# Altium PCB ESP32_USB_C.PcbDoc (part 1 of 3)
Units mil, origin at the board's own origin, x right, y up, seen from the top; angles counter-clockwise.
Board outline 2700 x 1000 mil, 4 copper layers (L1, L2, L3, L4), stack 61.605 mil thick; 61 components, 73 nets, 293 pads, 151 vias.
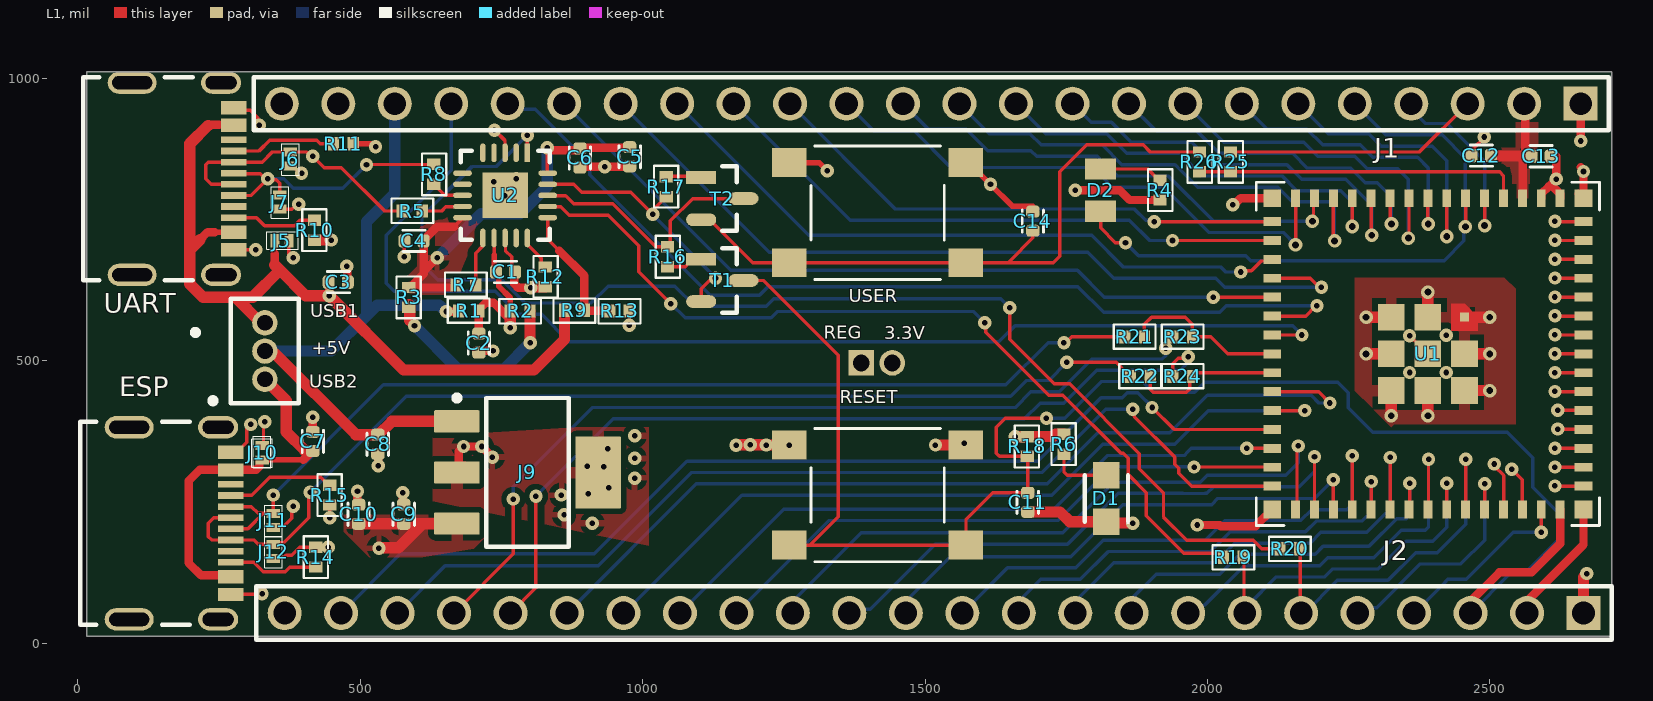
[diagram p0: L1 view]
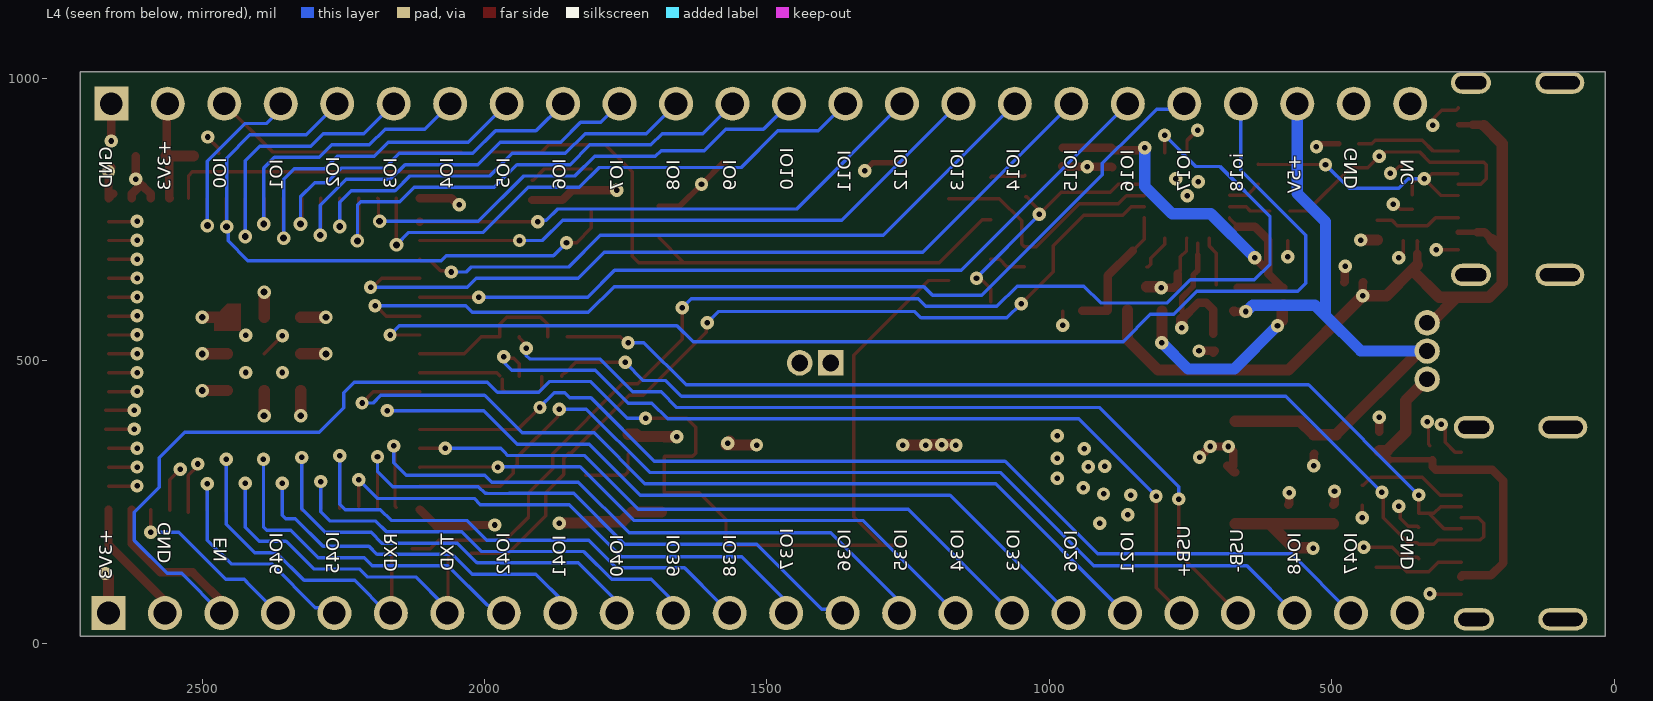
[diagram p1: L4 view, seen from below]
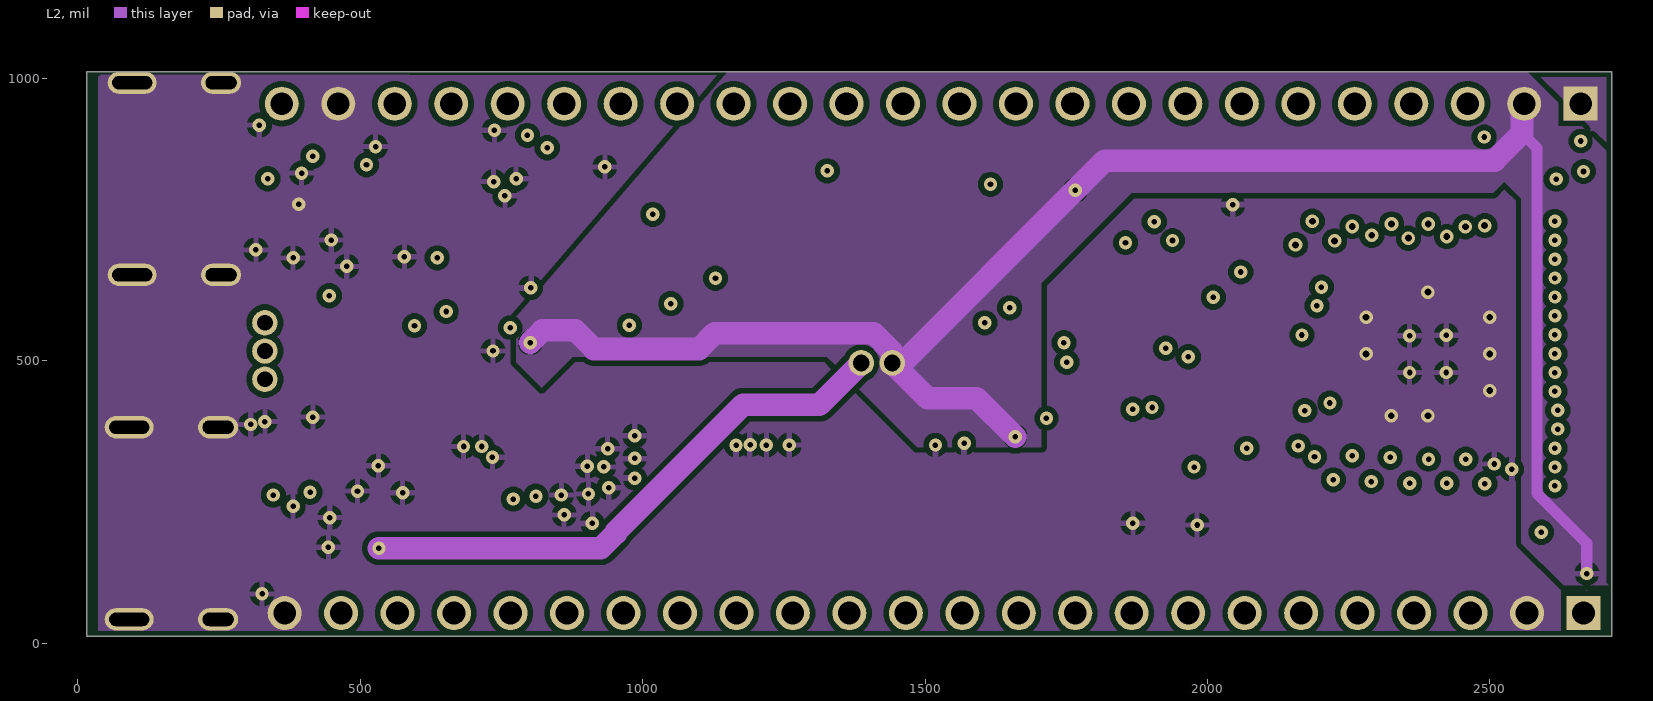
[diagram p2: L2]
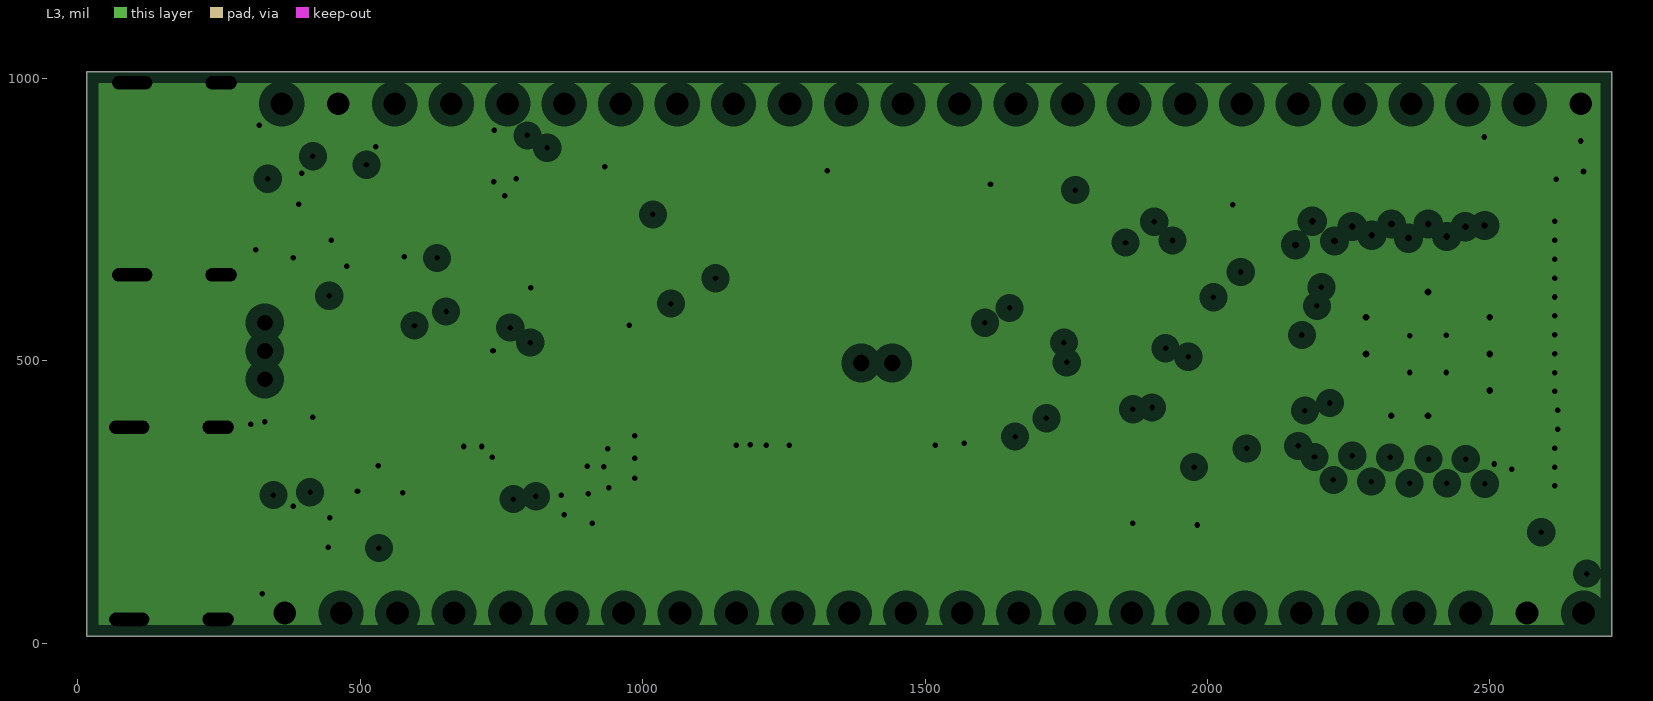
[diagram p3: L3, clearances drawn from the general rule]
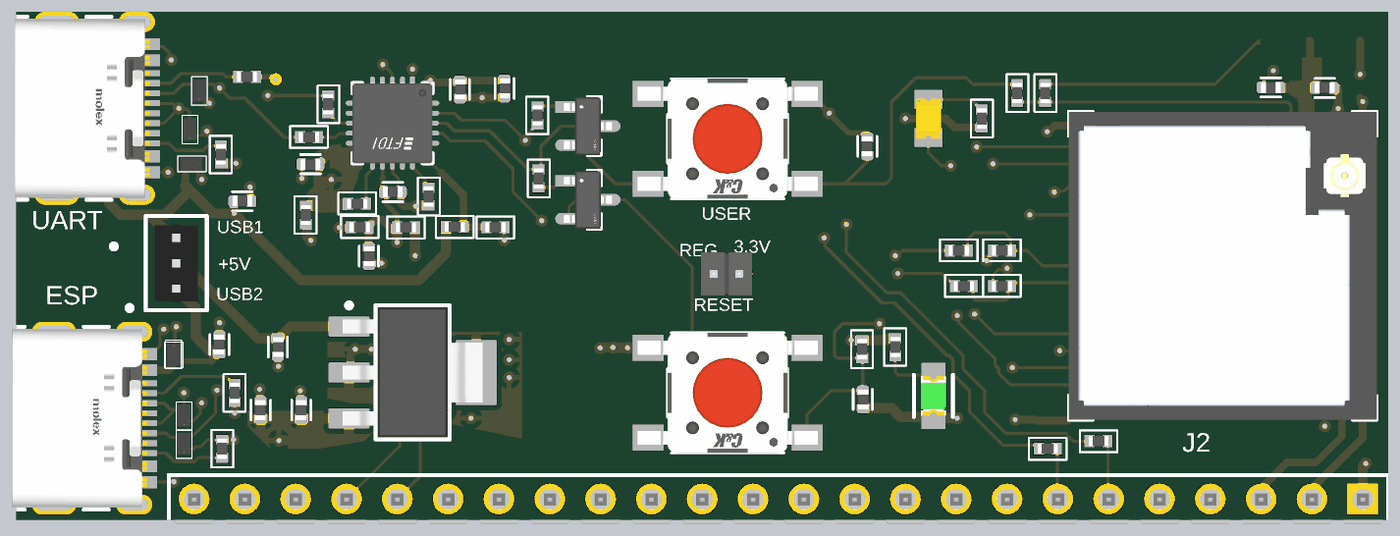
[diagram p4: 3D render of the assembled board from above, using the file's embedded part models]

## Layer stack, top to bottom
Top Solder: solder mask 0.4, Solder Resist, Dk 3.5
L1: signal copper 1.4
Dielectric 1: prepreg 3.9134, PP-006, Dk 4.1
L2: signal copper 0.5984
Dielectric1: dielectric 49.8031, FR-4, Dk 4.8
L3: plane copper 0.5984, net GND
Dielectric 2: prepreg 3.9134, PP-006, Dk 4.1
L4: signal copper 1.378
Bottom Solder: solder mask 0.4, Solder Resist, Dk 3.5

## Board outline
16,12 16,1012 2716,1012 2716,12

## Design rules (kind name [scope] priority, off if disabled: settings)
Clearance [All] p1: gap=10 ignorepadtopadclearanceinfootprint=TRUE
Clearance sall [WithinRoom('FTDI')or WithinRoom('SB1') or WithinRoom('SB2')] p2: gap=6 ignorepadtopadclearanceinfootprint=FALSE
MinimumSolderMaskSliver [All] p1: minsoldermaskwidth=1.02
PlaneClearance [All] p1: clearance=20
PlaneConnect [All] p1: planeconnectstyle=Direct reliefexpansion=20 reliefentries=4 reliefconductorwidth=10 reliefairgap=10
PolygonConnect [All] p1: thpad.connectstyle=Direct thpad.reliefconductorwidth=10 thpad.reliefentries=4 thpad.polygonreliefangle="90 Angle" thpad.airgapwidth=10 smdpad.connectstyle=Relief smdpad.reliefconductorwidth=20 smdpad.reliefentries=4 smdpad.polygonreliefangle="90 Angle" smdpad.airgapwidth=10 via.connectstyle=Direct via.reliefconductorwidth=10 via.reliefentries=4 via.polygonreliefangle="90 Angle" via.airgapwidth=10
RoomDefinition SB2 [False] p1: confinementstyle=ConfineIn formatcopy=TRUE lockcomponents=FALSE outline 226,362 331,362 331,77 226,77
RoomDefinition FTDI [False] p2: confinementstyle=ConfineIn formatcopy=TRUE lockcomponents=FALSE outline 881,687 651,687 651,927 881,927
RoomDefinition SB1 [False] p3: confinementstyle=ConfineIn formatcopy=TRUE lockcomponents=FALSE outline 331,667 216,667 216,967 331,967
RoutingVias [All] p1: holewidth=9.84 width=23.62 viastyle="Through Hole" minholewidth=9.84 minwidth=23.62 maxholewidth=12 maxwidth=24
SilkToSolderMaskClearance [IsPad] p1: minsilkscreentomaskgap=2 clearancetoexposedcopper=TRUE
SolderMaskExpansion [All] p1: expansion=1.5 istentingtop=FALSE
SupplyNets "Schematic Supply Nets_3" [InNet('+5V')] p1: voltage=0.000
SupplyNets "Schematic Supply Nets_5" [InNet('+5V_VBUS2')] p2: voltage=0.000
SupplyNets "Schematic Supply Nets_2" [InNet('+3V3_REG')] p3: voltage=0.000
SupplyNets "Schematic Supply Nets_7" [InNet('+3V3')] p4: voltage=0.000
SupplyNets "Schematic Supply Nets_6" [InNet('+5V_VBUS1')] p5: voltage=0.000
SupplyNets "Schematic Supply Nets_1" [InNet('GND')] p6: voltage=0.000
UnRoutedNet [All] p1: checkbadconnections=TRUE
Width [All] p1: maxlimit=100 minlimit=6 preferedwidth=10 minimp=50.000000 maximp=50.000000 favimp=50.000000
25 further rules are at their usual default settings.

## Components (designator, comment, footprint, x,y, rotation, side; value= is the part's Value field where it differs from the comment)
3.3V "FTS-103-01-F-DV-TR" HDRV2W40P0X127_1X2_254X214X400P 1389,496 r0 top locked (schematic designator J13)
C1 "4.7uF" CAPC1005X55N 757,657 r180 top value=4.7µF
C2 "CL10E104KC100uf,100V8VPNC" CAPC1005X55N 710,531 r90 top value=100nF
C3 "CL10E104KC100uf,100V8VPNC" CAPC1005X55N 461,639 r180 top locked value=100nF
C4 "CL10E104KC100uf,100V8VPNC" CAPC1005X55N 595,712 r0 top value=100nF
C5 "CL10E104KC100uf,100V8VPNC" CAPC1005X55N 977,861 r90 top value=100nF
C6 "CL10E104KC100uf,100V8VPNC" CAPC1005X55N 889,859 r90 top value=100nF
C7 "CL10E104KC100uf,100V8VPNC" CAPC1005X55N 416,357 r270 top locked value=100nF
C8 "4.7uF" CAPC1005X55N 531,352 r90 top locked value=4.7µF
C9 "10n F" CAPC1005X55N 577,228 r270 top locked value=10nF
C10 "10u F" CAPC1005X55N 497,228 r270 top locked value=10µF
C11 "1uF" CAPC1005X55N 1682,249 r90 top value=1µF
C12 "CL10E104KC100uf,100V8VPNC" CAPC1005X55N 2485,863 r0 top locked value=100nF
C13 "10uf,10V" CAPC1005X55N 2591,862 r180 top locked value=10µF
C14 "1uF" CAPC1005X55N 1691,747 r270 top locked value=1µF
D1 "GREEN" FP-APHCM2012CGCK-F01-MFG 1821,256 r90 top
D2 "red" LEDC2012X90N 1811,802 r90 top locked
ESP "217179-0001" FP-2171790001-MFG 136,212 r270 top locked (schematic designator J4)
J1 "22-28-4245" 7731111824LF 2650,1220 r0 top
J2 "22-28-4245" 7731111824LF 2655,318 r0 top locked
J5 "AQ3045-01ETG" RTVS_SOD882_LTF-M 361,712 r180 top
J6 "AQ3045-01ETG" RTVS_SOD882_LTF-M 376,857 r90 top
J7 "AQ3045-01ETG" RTVS_SOD882_LTF-M 357.25,780.75 r90 top
J9 "TL1963A-33DCYR (2)" DCY0004A_M 796,302 r0 top locked
J10 "AQ3045-01ETG" RTVS_SOD882_LTF-M 326,337 r270 top
J11 "AQ3045-01ETG" RTVS_SOD882_LTF-M 346,217 r90 top
J12 "AQ3045-01ETG" RTVS_SOD882_LTF-M 346,162 r90 top
R1 "0R" RESC1005X40N 692,588 r0 top locked value=0Ω
R2 "0R" RESC1005X40N 783,588 r180 top locked value=0Ω
R3 "0R" RESC1005X40N 586,612 r90 top value=0Ω
R4 "AC0603FR-101KL" RESC1005X40N 1916,802 r270 top locked value=1kΩ
R5 "27R" RESC1005X40N 592,765 r0 top value=27Ω
R6 "AC0603FR-101KL" RESC1005X40N 1746,352 r90 top value=1kΩ
R7 "OR" RESC1005X40N 687,634 r0 top value=1kΩ
R8 "27R" RESC1005X40N 630,830 r270 top locked value=27Ω
R9 "4.7K" RESC1005X40N 879,589 r180 top locked value=4.7kΩ
R10 "5K1" RESC1005X40N 419,731 r90 top locked value=5.1kΩ
R11 "5K1" RESC1005X40N 470,884 r180 top value=5.1kΩ
R12 "10K" RESC1005X40N 827.5,648.26 r270 top locked value=10kΩ
R13 "4.7K" RESC1005X40N 959,588 r180 top value=4.7kΩ
R14 "5K1" RESC1005X40N 421,152 r270 top value=5.1kΩ
R15 "5K1" RESC1005X40N 446,262 r90 top value=5.1kΩ
R16 "10K" RESC1005X40N 1044,684 r270 top locked value=10kΩ
R17 "10K" RESC1005X40N 1042,808 r90 top locked value=10kΩ
R18 "10K" RESC1005X40N 1681,348 r90 top value=10kΩ
R19 "0R" RESC1005X40N 2046,152 r180 top value=0Ω
R20 "0R" RESC1005X40N 2146,167 r180 top locked value=0Ω
R21 "0R" RESC1005X40N 1871,542 r0 top value=0Ω
R22 "0R" RESC1005X40N 1881,472 r0 top value=0Ω
R23 "0R" RESC1005X40N 1956,542 r0 top value=0Ω
R24 "0R" RESC1005X40N 1956,472 r0 top value=0Ω
R25 "27R" RESC1005X40N 2041,852 r270 top locked value=27Ω
R26 "27R" RESC1005X40N 1986,852 r270 top locked value=27Ω
RESET "PTS645SM43SMTR92LFS" PTS645SM43SMTR92LFS_MFG 1416,262 r180 top locked (schematic designator SW1)
T1 "SS8050-G" FP-SS8050-G-IPC_B 1141,642 r0 top locked
T2 "SS8050-G" FP-SS8050-G-IPC_B 1141,787 r0 top locked
U1 "ESP32-S3-MINI-1U-N8" XCVR_ESP32-S3-MINI-1U-N8 2390.41,512 r270 top locked
U2 "FT231XQ-R" FP-QFN-20-IPC_B 756.41,792.63 r270 top locked
UART "217179-0001" FP-2171790001-MFG 141.28,822.08 r270 top locked (schematic designator J3)
USB1 "FTS-103-01-F-S" SAMTEC-FTS-103-01-X-S 331,517 r270 top locked (schematic designator J8)
USER "PTS645SM43SMTR92LFS" PTS645SM43SMTR92LFS_MFG 1416,762 r180 top locked (schematic designator SW2)

## Footprints (in the part's own frame and the unit in brackets; to place one, negate y for a bottom-side part, rotate by r counter-clockwise, add the part's x,y. Pads: shape width x height; smd on the part's side, far side on the other; paste and mask are expansions set on the pad)
7731111824LF [mm]
  rect 1.53x1.53 hole 1.02: 1(0.279,-6.731)
  round 1.53 hole 1.02: 2(-2.261,-6.731) 3(-4.801,-6.731) 4(-7.341,-6.731) 5(-9.881,-6.731) 6(-12.421,-6.731) 7(-14.961,-6.731) 8(-17.501,-6.731) 9(-20.041,-6.731) 10(-22.581,-6.731) 11(-25.121,-6.731) 12(-27.661,-6.731) 13(-30.201,-6.731) 14(-32.741,-6.731) 15(-35.281,-6.731) 16(-37.821,-6.731) 17(-40.361,-6.731) 18(-42.901,-6.731) 19(-45.441,-6.731) 20(-47.981,-6.731) 21(-50.521,-6.731) 22(-53.061,-6.731) 23(-55.601,-6.731) 24(-58.141,-6.731)
  silkscreen extent -59.41,-7.93 1.55,-5.53, body extent -59.21,-7.96 1.35,-5.55, height 8.6
CAPC1005X55N [mm]
  rrect53% 0.54x0.6 smd: 1(-0.43,0) 2(0.43,0)
  silkscreen extent -0.5,-0.48 0.5,0.48, body extent -0.5,-0.3 0.5,0.25, height 0.5
DCY0004A_M [mm] "SOT223, 4-Leads, Body 6.7x3.7mm, Pitch 2.3mm, IPC Low Density"
  rrect10% 2.05x1 smd: 1(-3.175,2.3) 2(-3.175,0) 3(-3.175,-2.3)
  rrect5% 2.05x3.25 smd: 4(3.175,0)
  silkscreen extent -3.3,-3.35 1.85,3.47, body extent -3.5,-3.25 3.5,3.25, height 1.62
FP-2171790001-MFG [mm]
  rect 0.6x1.15 smd paste+0 mask+0: A1B12(-3.2,3.425) A4B9(-2.4,3.425) B1A12(3.2,3.425) B4A9(2.4,3.425)
  rect 0.3x1.15 smd paste+0 mask+0: A5(-1.25,3.425) A6(-0.25,3.425) A7(0.25,3.425) A8(1.25,3.425) B5(1.75,3.425) B6(0.75,3.425) B7(-0.75,3.425) B8(-1.75,3.425)
  rrect100% 1x1.8 hole 1.4 slot 0.6 at 0 deg paste-2539.97 mask+0: S1(-4.32,2.85) S2(4.32,2.85)
  rrect100% 1x2.2 hole 1.8 slot 0.6 at 0 deg paste-2539.97 mask+0: S3(-4.32,-1.15) S4(4.32,-1.15)
  silkscreen extent -5.64,-3.35 4.57,2.74, body extent -4.92,-3.45 4.92,4.1, height 0.25
FP-APHCM2012CGCK-F01-MFG [mm]
  rect 1.2x1.2 smd paste+0 mask+0: 1(-1.05,0) 2(1.05,0)
  silkscreen extent -1.05,-0.97 1.05,0.97, body extent -1.75,-0.77 1.75,0.77, height 0.25
FP-QFN-20-IPC_B [mm]
  rect 0.84x0.242 smd paste+0 mask+0: 1(-1.916,1)
  rrect100% 0.84x0.242 smd paste+0 mask+0: 2(-1.916,0.5) 3(-1.916,0) 4(-1.916,-0.5) 5(-1.916,-1) 11(1.916,-1) 12(1.916,-0.5) 13(1.916,0) 14(1.916,0.5) 15(1.916,1)
  rrect100% 0.242x0.84 smd paste+0 mask+0: 6(-1,-1.916) 7(-0.5,-1.916) 8(0,-1.916) 9(0.5,-1.916) 10(1,-1.916) 16(1,1.916) 17(0.5,1.916) 18(0,1.916) 19(-0.5,1.916) 20(-1,1.916)
  rect 2.05x2.05 smd paste-1000 mask+0: 21(0,0)
  silkscreen extent -2,-2 2,2, body extent -2.59,-2.59 2.59,2.59, height 0.25
FP-SS8050-G-IPC_B [mm]
  rect 1.357x0.572 smd paste+0 mask+0: 1(-0.951,0.95)
  rrect100% 1.357x0.572 smd paste+0 mask+0: 2(-0.951,-0.95) 3(0.951,0)
  silkscreen extent 0,-1.45 0.65,1.45, body extent -1.88,-1.7 1.88,1.7, height 0.25
HDRV2W40P0X127_1X2_254X214X400P [mm]
  rect 1.15x1.15 / inner round 1.15 / far side rect 1.15x1.15 hole 0.75: 1(-0.051,0)
  round 1.15 hole 0.75: 2(1.346,0)
  body extent -0.64,-1.07 1.91,1.07, height 4
LEDC2012X90N [mm]
  rect 0.95x1.4 smd: 1(-0.95,0) 2(0.95,0)
  body extent -1,-0.63 1,0.63, height 0.8
PTS645SM43SMTR92LFS_MFG [mm] "Recommended Land Pattern"
  rect 1.55x1.3 smd paste+0 mask+0: 1(-3.975,2.25) 2(3.975,2.25) 3(-3.975,-2.25) 4(3.975,-2.25)
  silkscreen extent -3,-3 3,3, body extent -4.5,-3 4.5,3, height 5.3
RESC1005X40N [mm]
  rect 0.51x0.6 smd: 1(-0.445,0) 2(0.445,0)
  silkscreen extent -0.94,-0.53 0.94,0.56, body extent -0.5,-0.25 0.5,0.25, height 0.4
RTVS_SOD882_LTF-M [mil]
  rect 15.94x23.97 smd paste+0 mask+0: 1(-12.5,0) 2(12.5,0)
  silkscreen extent -29,-16 27,15, body extent -21,-13 21,13, height 22
SAMTEC-FTS-103-01-X-S [mil]
  round 45 hole 27.95 mask+0: 1(-50,0) 2(0,0) 3(50,0)
  silkscreen extent -93,-60 93,60, body extent -75,-43 75,43, height 90
XCVR_ESP32-S3-MINI-1U-N8 [mm]
  rect 0.8x0.4 smd: 1(-7,5.95) 2(-7,5.1) 3(-7,4.25) 4(-7,3.4) 5(-7,2.55) 6(-7,1.7) 7(-7,0.85) 8(-7,0) 9(-7,-0.85) 10(-7,-1.7) 11(-7,-2.55) 12(-7,-3.4) 13(-7,-4.25) 14(-7,-5.1) 15(-7,-5.95) 31(7,-5.95) 32(7,-5.1) 33(7,-4.25) 34(7,-3.4) 35(7,-2.55) 36(7,-1.7) 37(7,-0.85) 38(7,0) 39(7,0.85) 40(7,1.7) 41(7,2.55) 42(7,3.4) 43(7,4.25) 44(7,5.1) 45(7,5.95)
  rect 0.4x0.8 smd: 16(-5.95,-7) 17(-5.1,-7) 18(-4.25,-7) 19(-3.4,-7) 20(-2.55,-7) 21(-1.7,-7) 22(-0.85,-7) 23(0,-7) 24(0.85,-7) 25(1.7,-7) 26(2.55,-7) 27(3.4,-7) 28(4.25,-7) 29(5.1,-7) 30(5.95,-7) 46(5.95,7) 47(5.1,7) 48(4.25,7) 49(3.4,7) 50(2.55,7) 51(1.7,7) 52(0.85,7) 53(0,7) 54(-0.85,7) 55(-1.7,7) 56(-2.55,7) 57(-3.4,7) 58(-4.25,7) 59(-5.1,7) 60(-5.95,7)
  rect 1.2x1.2 smd: 61(0,0) 67(0,1.65) 68(1.65,1.65) 69(-1.65,0) 70(1.65,0) 71(-1.65,-1.65) 72(0,-1.65) 73(1.65,-1.65)
  rect 0.8x0.8 smd: 62(-7,7) 63(-7,-7) 64(7,-7) 65(7,7)
  rect 0.4x0.4 smd paste-1 mask+0: 66(-1.65,1.65)
  L1 region: -1.05,1.05 -2.25,1.05 -2.25,1.65 -1.65,2.25 -1.05,2.25
  silkscreen extent -7.72,-7.72 7.72,7.72, body extent -7.7,-7.7 7.7,7.7, height 2.55

## Part data
3.3V: "Pin Header, Board-to-Board, Wire-to-Board, 3.4 A, 1.27 mm, 2 Rows, 6 Contacts, Surface Mount", Current Rating=3.4A, Housing Color=Black, Manufacturer=Samtec, Manufacturer Lifecycle Status=PRODUCTION, Max Operating Temperature=125°C, Min Operating Temperature=-55°C, Supplier Part Number=SAM14930DKR-ND, Category="Board to Board Connectors", ComponentLink1Description=https://sigma.octopart.com:443/149591664/technical_drawing/Samtec-FTS-103-01-F-DV-TR.pdf?src-supplier=Upverter, ComponentLink1URL=https://sigma.octopart.com:443/149591664/technical_drawing/Samtec-FTS-103-01-F-DV-TR.pdf?src-supplier=Upverter, ComponentLink2Description=https://datasheet.octopart.com:443/FTS-103-01-F-DV-TR-Samtec-datasheet-97029283.pdf?src-supplier=Samtec, ComponentLink2URL=https://datasheet.octopart.com:443/FTS-103-01-F-DV-TR-Samtec-datasheet-97029283.pdf?src-supplier=Samtec, ComponentLink3Description=https://sigma.octopart.com:443/97029284/technical_drawing/Samtec-FTS-103-01-F-DV-TR.pdf?src-supplier=Samtec, ComponentLink3URL=https://sigma.octopart.com:443/97029284/technical_drawing/Samtec-FTS-103-01-F-DV-TR.pdf?src-supplier=Samtec, ComponentLink4Description=https://datasheet.octopart.com:443/FTS-103-01-F-DV-TR-Samtec-datasheet-118493358.pdf?src-supplier=Electro+Sonic, ComponentLink4URL=https://datasheet.octopart.com:443/FTS-103-01-F-DV-TR-Samtec-datasheet-118493358.pdf?src-supplier=Electro+Sonic, ComponentLink5Description=https://datasheet.octopart.com:443/FTS-103-01-F-DV-TR-Samtec-datasheet-38942038.pdf?src-supplier=Newark, ComponentLink5URL=https://datasheet.octopart.com:443/FTS-103-01-F-DV-TR-Samtec-datasheet-38942038.pdf?src-supplier=Newark, ComponentLink6Description=https://datasheet.octopart.com:443/FTS-103-01-F-DV-TR-Samtec-datasheet-62107111.pdf?src-supplier=Newark, ComponentLink6URL=https://datasheet.octopart.com:443/FTS-103-01-F-DV-TR-Samtec-datasheet-62107111.pdf?src-supplier=Newark, ComponentLink7Description=https://datasheet.octopart.com:443/FTS-103-01-F-DV-TR-Samtec-datasheet-24969243.pdf?src-supplier=Newark, ComponentLink7URL=https://datasheet.octopart.com:443/FTS-103-01-F-DV-TR-Samtec-datasheet-24969243.pdf?src-supplier=Newark, ComponentLink8Description=https://datasheet.octopart.com:443/FTS-103-01-F-DV-TR-Samtec-datasheet-165596534.pdf?src-supplier=JRH+Electronics, ComponentLink8URL=https://datasheet.octopart.com:443/FTS-103-01-F-DV-TR-Samtec-datasheet-165596534.pdf?src-supplier=JRH+Electronics, ComponentLink9Description=https://datasheet.octopart.com:443/FTS-103-01-F-DV-TR-Samtec-datasheet-176663378.pdf?src-supplier=Toby+Electronics, ComponentLink9URL=https://datasheet.octopart.com:443/FTS-103-01-F-DV-TR-Samtec-datasheet-176663378.pdf?src-supplier=Toby+Electronics, ComponentLink10Description=https://datasheet.octopart.com:443/FTS-103-01-F-DV-TR-Samtec-datasheet-116535195.pdf?src-supplier=Toby+Electronics, ComponentLink10URL=https://datasheet.octopart.com:443/FTS-103-01-F-DV-TR-Samtec-datasheet-116535195.pdf?src-supplier=Toby+Electronics, ComponentLink11Description=https://datasheet.octopart.com:443/FTS-103-01-F-DV-TR-Samtec-datasheet-136395376.pdf?src-supplier=Toby+Electronics, ComponentLink11URL=https://datasheet.octopart.com:443/FTS-103-01-F-DV-TR-Samtec-datasheet-136395376.pdf?src-supplier=Toby+Electronics, ComponentLink12Description=https://datasheet.octopart.com:443/FTS-103-01-F-DV-TR-Samtec-datasheet-151470456.pdf?src-supplier=Sager+Electronics, ComponentLink12URL=https://datasheet.octopart.com:443/FTS-103-01-F-DV-TR-Samtec-datasheet-151470456.pdf?src-supplier=Sager+Electronics, ComponentLink13Description=https://datasheet.octopart.com:443/FTS-103-01-F-DV-TR-Samtec-datasheet-140570650.pdf?src-supplier=Arrow.cn, ComponentLink13URL=https://datasheet.octopart.com:443/FTS-103-01-F-DV-TR-Samtec-datasheet-140570650.pdf?src-supplier=Arrow.cn, Contact Material="Gold, Nickel", Contact Plating=Gold, Depth=3.42mm, Gender=Male, Height=4.58mm, Housing Material=Polymer, Length=3.81mm, Lifecycle Status=Production, Manufacturer Part Number=FTS-103-01-F-DV-TR, Number of Contacts=6, Number of Rows=2, Orientation=Straight, Pitch=1.27mm, Pricing="1=1.34, 10=1.14, 100=0.9687 (USD)", Radiation Hardening=No, REACH SVHC=No, RoHS=Compliant, Schedule B="8536694040, 8536694040|8536694040|8536694040|8536694040|8536694040", Stock=10377, Supplier=DigiKey, Termination=Solder
C1 C8: library part CC0402MRX5R6BB475, "10V 4.7uF X5R ±20% 0402 Multilayer Ceramic Capacitors MLCC - SMD/SMT ROHS", Case Code (Imperial)=0402, Case Code (Metric)=1005, Dielectric=X5R, Dielectric Material=Ceramic, Manufacturer="Yageo Group", Max Operating Temperature=85°C, Min Operating Temperature=-55°C, Supplier Part Number=311-1734-1-ND, Temperature Coefficient=30ppm/°C, Tolerance=20%, Voltage Rating=10V, Case/Package=0402, Category="Ceramic Capacitors", China RoHS=Compliant, ComponentLink1Description=https://datasheet.octopart.com:443/CC0402MRX5R6BB475-Yageo-datasheet-170350636.pdf?src-supplier=IHS, ComponentLink1URL=https://datasheet.octopart.com:443/CC0402MRX5R6BB475-Yageo-datasheet-170350636.pdf?src-supplier=IHS, ComponentLink2Description=https://datasheet.octopart.com:443/CC0402MRX5R6BB475-Yageo-datasheet-78855684.pdf?src-supplier=Upverter, ComponentLink2URL=https://datasheet.octopart.com:443/CC0402MRX5R6BB475-Yageo-datasheet-78855684.pdf?src-supplier=Upverter, ComponentLink3Description=https://datasheet.octopart.com:443/CC0402MRX5R6BB475-Yageo-datasheet-140260304.pdf?src-supplier=Newark, ComponentLink3URL=https://datasheet.octopart.com:443/CC0402MRX5R6BB475-Yageo-datasheet-140260304.pdf?src-supplier=Newark, ComponentLink4Description=https://datasheet.octopart.com:443/CC0402MRX5R6BB475-Yageo-Group-datasheet-175963154.pdf?src-supplier=Newark, ComponentLink4URL=https://datasheet.octopart.com:443/CC0402MRX5R6BB475-Yageo-Group-datasheet-175963154.pdf?src-supplier=Newark, ComponentLink5Description=https://datasheet.octopart.com:443/CC0402MRX5R6BB475-Yageo-datasheet-158238148.pdf?src-supplier=Newark, ComponentLink5URL=https://datasheet.octopart.com:443/CC0402MRX5R6BB475-Yageo-datasheet-158238148.pdf?src-supplier=Newark, ComponentLink6Description=https://datasheet.octopart.com:443/CC0402MRX5R6BB475-Yageo-datasheet-182029487.pdf?src-supplier=Farnell, ComponentLink6URL=https://datasheet.octopart.com:443/CC0402MRX5R6BB475-Yageo-datasheet-182029487.pdf?src-supplier=Farnell, ComponentLink7Description=https://datasheet.octopart.com/CC0402MRX5R6BB475-Yageo-datasheet-86397281.pdf, ComponentLink7URL=https://datasheet.octopart.com/CC0402MRX5R6BB475-Yageo-datasheet-86397281.pdf, ComponentLink8Description=https://datasheet.octopart.com:443/CC0402MRX5R6BB475-Yageo-Group-datasheet-189192896.pdf?src-supplier=TME, ComponentLink8URL=https://datasheet.octopart.com:443/CC0402MRX5R6BB475-Yageo-Group-datasheet-189192896.pdf?src-supplier=TME, ComponentLink9Description=https://datasheet.octopart.com:443/CC0402MRX5R6BB475-Yageo-Group-datasheet-145016144.pdf?src-supplier=ODG+(Origin+Data+Global), ComponentLink9URL=https://datasheet.octopart.com:443/CC0402MRX5R6BB475-Yageo-Group-datasheet-145016144.pdf?src-supplier=ODG+(Origin+Data+Global), ComponentLink10Description=https://datasheet.octopart.com:443/CC0402MRX5R6BB475-Yageo-datasheet-137700085.pdf?src-supplier=Future+Electronics, ComponentLink10URL=https://datasheet.octopart.com:443/CC0402MRX5R6BB475-Yageo-datasheet-137700085.pdf?src-supplier=Future+Electronics, ComponentLink11Description=https://datasheet.octopart.com:443/CC0402MRX5R6BB475-Yageo-datasheet-78855687.pdf?src-supplier=Future+Electronics, ComponentLink11URL=https://datasheet.octopart.com:443/CC0402MRX5R6BB475-Yageo-datasheet-78855687.pdf?src-supplier=Future+Electronics, ComponentLink12Description=http://sigma.octopart.com:80/conflict_mineral_statement/Yageo-company-3.pdf?src-supplier=Compliance+Statements, ComponentLink12URL=http://sigma.octopart.com:80/conflict_mineral_statement/Yageo-company-3.pdf?src-supplier=Compliance+Statements, ComponentLink13Description=http://sigma.octopart.com:80/rohs_statement/Yageo-company-2.pdf?src-supplier=Compliance+Statements, ComponentLink13URL=http://sigma.octopart.com:80/rohs_statement/Yageo-company-2.pdf?src-supplier=Compliance+Statements, Country of Origin="Mainland China, Taiwan", Export Control Classification Number (ECCN) Code=EAR99, Halogen Free="Halogen Free", Harmonized Tariff Schedule (HTS) Code=8532.24.00.20, Height=500µm, Introduction Date=2014-07-08, Lead Free="Lead Free", Length=1mm, Lifecycle Status=Production, Manufacturer Part Number=CC0402MRX5R6BB475, Material=Ceramic, Mounting Technology="Surface Mount", Number of Terminals=2, Packaging="Tape & Reel (TR)", Pricing="1=0.1, 10=0.055, 50=0.038, 100=0.0328, 500=0.02396, 1000=0.02127, 2500=0.01843, 5000=0.01673 (USD)", REACH SVHC=Yes, RoHS=Compliant, Stock=3327, Supplier=DigiKey, Termination=SMD/SMT, Thickness=558.8µm, Voltage Rating (DC)=10V, Weight=652.039032µg, Width=500µm
C2 C3 C4 C5 C6 C7 C12: library part CL10E104KC8VPNC, "Ceramic Capacitor, Multilayer, Ceramic, 100V, 10% +Tol, 10% -Tol, X8L, -40~+15% TC, 100nF, Surface Mount, 0603 inch", Case/Package=0603, Dielectric Material=Ceramic, Manufacturer="Samsung Electro-Mechanics", Max Operating Temperature=150°C, Min Operating Temperature=-55°C, Ratings=AEC-Q200, Supplier Part Number=1276-CL10E104KC8VPNCDKR-ND, Voltage Rating (DC)=100V, Category="Ceramic Capacitors", Height=800µm, Length=1.6mm, Lifecycle Status=Production, Manufacturer Part Number=CL10E104KC8VPNC, Mounting Technology="Surface Mount", Number of Terminals=2, Pricing="1=0.27, 10=0.155, 50=0.1122, 100=0.0989, 500=0.07654, 1000=0.06965 (USD)", REACH SVHC=Yes, RoHS=Compliant, Stock=438805, Supplier=DigiKey, Width=800µm
C9: library part AC0612MRX7R9BB103, "Surface Mount Ceramic Multilayer Capacitor Automotive Grade 0.01uF 20% X7R 50V 0612 Paper T/R", Case/Package=0612, Dielectric=X7R, Dielectric Material=Ceramic, Manufacturer="Yageo Group", Max Operating Temperature=125°C, Min Operating Temperature=-55°C, Ratings=AEC-Q200, Supplier Part Number=13-AC0612MRX7R9BB103CT-ND, Temperature Coefficient=30ppm/°C, Tolerance=20%, Voltage Rating=50V, Category="Capacitor Arrays", China RoHS=Non-Compliant, ComponentLink1Description=https://datasheet.octopart.com:443/AC0612MRX7R9BB103-Yageo-datasheet-170350635.pdf?src-supplier=IHS, ComponentLink1URL=https://datasheet.octopart.com:443/AC0612MRX7R9BB103-Yageo-datasheet-170350635.pdf?src-supplier=IHS, ComponentLink2Description=https://datasheet.octopart.com:443/AC0612MRX7R9BB103-Yageo-datasheet-130008987.pdf?src-supplier=Upverter, ComponentLink2URL=https://datasheet.octopart.com:443/AC0612MRX7R9BB103-Yageo-datasheet-130008987.pdf?src-supplier=Upverter, ComponentLink3Description=https://datasheet.octopart.com:443/AC0612MRX7R9BB103-Yageo-datasheet-182878021.pdf?src-supplier=Farnell, ComponentLink3URL=https://datasheet.octopart.com:443/AC0612MRX7R9BB103-Yageo-datasheet-182878021.pdf?src-supplier=Farnell, ComponentLink4Description=http://sigma.octopart.com:80/conflict_mineral_statement/Yageo-company-3.pdf?src-supplier=Compliance+Statements, ComponentLink4URL=http://sigma.octopart.com:80/conflict_mineral_statement/Yageo-company-3.pdf?src-supplier=Compliance+Statements, ComponentLink5Description=http://sigma.octopart.com:80/rohs_statement/Yageo-company-2.pdf?src-supplier=Compliance+Statements, ComponentLink5URL=http://sigma.octopart.com:80/rohs_statement/Yageo-company-2.pdf?src-supplier=Compliance+Statements, Country of Origin="Mainland China, Taiwan", Export Control Classification Number (ECCN) Code=EAR99, Harmonized Tariff Schedule (HTS) Code=8532.25.00.45, Height=800µm, Height - Seated (Max)=800µm, Introduction Date=2017-01-16, Length=3.2mm, Lifecycle Status=Production, Manufacturer Part Number=AC0612MRX7R9BB103, Material=Ceramic, Mounting Technology="Surface Mount", Number of Circuits=4, Number of Elements=1, Number of Terminals=8, Pricing="1=0.45, 10=0.272, 50=0.2022, 100=0.1808, 500=0.14454, 1000=0.13334 (USD)", REACH SVHC=Yes, RoHS=Compliant, Stock=4000, Supplier=DigiKey, Terminal Pitch=800µm, Voltage Rating (DC)=50V, Width=1.6mm
C10: library part C0805C106K9RACTU, "SMD Comm X7R 0805 (2012Metric) Ceramic Capacitor 0.079Lx0.049W 2.00mmx1.25mm X7R ±10% 10muF", Case Code (Imperial)=0805, Case Code (Metric)=2012, Dielectric=X7R, Dielectric Material=Ceramic, Manufacturer="Yageo Group", Manufacturer Package Identifier="0805 (2012 metric)", Max Operating Temperature=125°C, Min Operating Temperature=-55°C, Supplier Part Number=399-C0805C106K9RACTUDKR-ND, Tolerance=10%, Voltage Rating=6.3V, Case/Package=0805, Category="Ceramic Capacitors", China RoHS=Compliant, ComponentLink1Description=https://datasheet.octopart.com:443/C0805C106K9RACTU-KEMET-datasheet-178445679.pdf?src-supplier=IHS, ComponentLink1URL=https://datasheet.octopart.com:443/C0805C106K9RACTU-KEMET-datasheet-178445679.pdf?src-supplier=IHS, ComponentLink2Description=https://datasheet.octopart.com:443/C0805C106K9RAC7800-KEMET-datasheet-184793276.pdf?src-supplier=IHS, ComponentLink2URL=https://datasheet.octopart.com:443/C0805C106K9RAC7800-KEMET-datasheet-184793276.pdf?src-supplier=IHS, ComponentLink3Description=https://datasheet.octopart.com:443/C0805C106K9RACTU-KEMET-datasheet-137357759.pdf?src-supplier=Farnell, ComponentLink3URL=https://datasheet.octopart.com:443/C0805C106K9RACTU-KEMET-datasheet-137357759.pdf?src-supplier=Farnell, ComponentLink4Description=https://datasheet.octopart.com:443/C0805C106K9RACTU-KEMET-datasheet-100448665.pdf?src-supplier=Farnell, ComponentLink4URL=https://datasheet.octopart.com:443/C0805C106K9RACTU-KEMET-datasheet-100448665.pdf?src-supplier=Farnell, ComponentLink5Description=https://datasheet.octopart.com:443/C0805C106K9RACTU-KEMET-datasheet-74831648.pdf?src-supplier=Farnell, ComponentLink5URL=https://datasheet.octopart.com:443/C0805C106K9RACTU-KEMET-datasheet-74831648.pdf?src-supplier=Farnell, ComponentLink6Description=https://datasheet.octopart.com:443/C0805C106K9RACTU-Kemet-datasheet-66076756.pdf?src-supplier=element14+APAC, ComponentLink6URL=https://datasheet.octopart.com:443/C0805C106K9RACTU-Kemet-datasheet-66076756.pdf?src-supplier=element14+APAC, ComponentLink7Description=https://datasheet.octopart.com:443/C0805C106K9RACTU-Kemet-datasheet-62058920.pdf?src-supplier=element14+APAC, ComponentLink7URL=https://datasheet.octopart.com:443/C0805C106K9RACTU-Kemet-datasheet-62058920.pdf?src-supplier=element14+APAC, ComponentLink8Description=https://datasheet.octopart.com:443/C0805C106K9RACTU-KEMET-datasheet-68331906.pdf?src-supplier=element14+APAC, ComponentLink8URL=https://datasheet.octopart.com:443/C0805C106K9RACTU-KEMET-datasheet-68331906.pdf?src-supplier=element14+APAC, ComponentLink9Description=https://datasheet.octopart.com:443/C0805C106K9RACTU-KEMET-datasheet-176289605.pdf?src-supplier=Newark, ComponentLink9URL=https://datasheet.octopart.com:443/C0805C106K9RACTU-KEMET-datasheet-176289605.pdf?src-supplier=Newark, ComponentLink10Description=https://datasheet.octopart.com:443/C0805C106K9RACTU-KEMET-datasheet-130256537.pdf?src-supplier=Newark, ComponentLink10URL=https://datasheet.octopart.com:443/C0805C106K9RACTU-KEMET-datasheet-130256537.pdf?src-supplier=Newark, ComponentLink11Description=https://datasheet.octopart.com:443/C0805C106K9RACTU-Kemet-datasheet-21527579.pdf?src-supplier=Newark, ComponentLink11URL=https://datasheet.octopart.com:443/C0805C106K9RACTU-Kemet-datasheet-21527579.pdf?src-supplier=Newark, ComponentLink12Description=https://datasheet.octopart.com:443/C0805C106K9RACTU-Kemet-datasheet-17019117.pdf?src-supplier=Newark, ComponentLink12URL=https://datasheet.octopart.com:443/C0805C106K9RACTU-Kemet-datasheet-17019117.pdf?src-supplier=Newark, ComponentLink13Description=https://datasheet.octopart.com:443/C0805C106K9RACTU-KEMET-datasheet-157246124.pdf?src-supplier=TME, ComponentLink13URL=https://datasheet.octopart.com:443/C0805C106K9RACTU-KEMET-datasheet-157246124.pdf?src-supplier=TME, ComponentLink14Description=https://datasheet.octopart.com/C0805C106K9RACTU-KEMET-datasheet-84169754.pdf, ComponentLink14URL=https://datasheet.octopart.com/C0805C106K9RACTU-KEMET-datasheet-84169754.pdf, Country of Origin=Mexico, Depth=1.25mm, Dissipation Factor=7.5%, Export Control Classification Number (ECCN) Code=EAR99, Harmonized Tariff Schedule (HTS) Code=8532.24.00.20, Height=1.25mm, Introduction Date=2012-05-22, Length=2mm, Lifecycle Status=Production, Manufacturer Part Number=C0805C106K9RACTU, Material=Ceramic, Mounting Technology="Surface Mount", Number of Terminals=2, Packaging="Cut Tape", Pricing="1=0.67, 10=0.417, 50=0.3166, 100=0.2858, 500=0.23376, 1000=0.21768 (USD)", REACH SVHC=Yes, RoHS=Compliant, Schedule B="8532240020, 8532240020|8532240020|8532240020|8532240020|8532240020", Stock=33258, Supplier=DigiKey, Termination=SMD/SMT, Thickness=1.397mm, Voltage Rating (DC)=6.3V, Width=1.25mm
C11 C14: library part CL05A105KO5NNNC, "16V 1uF X5R 卤10% 0402 Multilayer Ceramic Capacitors MLCC - SMD/SMT ROHS", Case Code (Imperial)=0402, Case Code (Metric)=1005, Dielectric=X5R, Dielectric Material=Ceramic, Manufacturer="Samsung Electro-Mechanics", Max Operating Temperature=85°C, Min Operating Temperature=-55°C, Supplier Part Number=1276-1067-2-ND, Tolerance=10%, Voltage=16V, Case/Package=0402, Category="Ceramic Capacitors", China RoHS=Compliant, ComponentLink1Description=https://datasheet.octopart.com:443/CL05A105KO5NNNC-Samsung-Electro-Mechanics-datasheet-181960514.pdf?src-supplier=IHS, ComponentLink1URL=https://datasheet.octopart.com:443/CL05A105KO5NNNC-Samsung-Electro-Mechanics-datasheet-181960514.pdf?src-supplier=IHS, ComponentLink2Description=https://datasheet.octopart.com:443/CL05A105KO5NNNC-Samsung-Electro-Mechanics-datasheet-136031720.pdf?src-supplier=Samsung+SCT, ComponentLink2URL=https://datasheet.octopart.com:443/CL05A105KO5NNNC-Samsung-Electro-Mechanics-datasheet-136031720.pdf?src-supplier=Samsung+SCT, ComponentLink3Description=https://datasheet.octopart.com:443/CL05A105KO5NNNC-Samsung-Electro-Mechanics-datasheet-11776774.pdf?src-supplier=Future+Electronics, ComponentLink3URL=https://datasheet.octopart.com:443/CL05A105KO5NNNC-Samsung-Electro-Mechanics-datasheet-11776774.pdf?src-supplier=Future+Electronics, ComponentLink4Description=https://datasheet.octopart.com:443/CL05A105KO5NNNC-Samsung-Electro-Mechanics-datasheet-110226202.pdf?src-supplier=Future+Electronics, ComponentLink4URL=https://datasheet.octopart.com:443/CL05A105KO5NNNC-Samsung-Electro-Mechanics-datasheet-110226202.pdf?src-supplier=Future+Electronics, ComponentLink5Description=https://datasheet.octopart.com:443/CL05A105KO5NNNC-Samsung-Electro-Mechanics-datasheet-81461590.pdf?src-supplier=Future+Electronics, ComponentLink5URL=https://datasheet.octopart.com:443/CL05A105KO5NNNC-Samsung-Electro-Mechanics-datasheet-81461590.pdf?src-supplier=Future+Electronics, ComponentLink6Description=https://datasheet.octopart.com:443/CL05A105KO5NNNC-Samsung-datasheet-42280519.pdf?src-supplier=Future+Electronics, ComponentLink6URL=https://datasheet.octopart.com:443/CL05A105KO5NNNC-Samsung-datasheet-42280519.pdf?src-supplier=Future+Electronics, ComponentLink7Description=https://datasheet.octopart.com:443/CL05A105KO5NNNC-Samsung-datasheet-34152987.pdf?src-supplier=Future+Electronics, ComponentLink7URL=https://datasheet.octopart.com:443/CL05A105KO5NNNC-Samsung-datasheet-34152987.pdf?src-supplier=Future+Electronics, ComponentLink8Description=https://datasheet.octopart.com:443/CL05A105KO5NNNC-Samsung-datasheet-8329584.pdf?src-supplier=Future+Electronics, ComponentLink8URL=https://datasheet.octopart.com:443/CL05A105KO5NNNC-Samsung-datasheet-8329584.pdf?src-supplier=Future+Electronics, ComponentLink9Description=https://datasheet.octopart.com:443/CL05A105KO5NNNC-Samsung-Electro-Mechanics-datasheet-149136633.pdf?src-supplier=Future+Electronics, ComponentLink9URL=https://datasheet.octopart.com:443/CL05A105KO5NNNC-Samsung-Electro-Mechanics-datasheet-149136633.pdf?src-supplier=Future+Electronics, ComponentLink10Description=https://datasheet.octopart.com/CL05A105KO5NNNC-Samsung-Electro-Mechanics-datasheet-97040617.pdf, ComponentLink10URL=https://datasheet.octopart.com/CL05A105KO5NNNC-Samsung-Electro-Mechanics-datasheet-97040617.pdf, ComponentLink11Description=https://datasheet.octopart.com/CL05A105KO5NNNC-Samsung-Electro-Mechanics-datasheet-8324245.pdf, ComponentLink11URL=https://datasheet.octopart.com/CL05A105KO5NNNC-Samsung-Electro-Mechanics-datasheet-8324245.pdf, ComponentLink12Description=https://datasheet.octopart.com:443/CL05A105KO5NNNC-Samsung-datasheet-59220082.pdf?src-supplier=TME, ComponentLink12URL=https://datasheet.octopart.com:443/CL05A105KO5NNNC-Samsung-datasheet-59220082.pdf?src-supplier=TME, Contact Plating=Tin, Depth=500µm, Height=550µm, Length=1mm, Lifecycle Status=Production, Manufacturer Part Number=CL05A105KO5NNNC, Material=Ceramic, Mounting Technology="Surface Mount", Number of Terminals=2, Pricing="10000=0.00891, 20000=0.00815, 30000=0.00777, 50000=0.00734, 70000=0.0071, 100000=0.00686 (USD)", Radiation Hardening=No, REACH SVHC=Yes, RoHS=Compliant, Schedule B="8532240020, 8532240020|8532240020, 8532240020|8532240020|8532240020, 8532240020|8532240020|8532240020|8532240020", Stock=6622206, Supplier=DigiKey, Thickness=558.8µm, Voltage Rating=16V, Voltage Rating (DC)=16V, Width=500µm
C13: library part CL05A106MP8NUB8, "10V 10uF X5R 卤20% 0402 Multilayer Ceramic Capacitors MLCC - SMD/SMT ROHS", Case Code (Imperial)=0402, Case Code (Metric)=1005, Dielectric Material=Ceramic, Manufacturer="Samsung Electro-Mechanics", Max Operating Temperature=85°C, Min Operating Temperature=-55°C, Supplier Part Number=1276-6830-1-ND, Tolerance=20%, Voltage Rating=10V, Case/Package=0402, Category="Ceramic Capacitors", China RoHS=Compliant, ComponentLink1Description=https://datasheet.octopart.com:443/CL05A106MP8NUB8-Samsung-Electro-Mechanics-datasheet-136460857.pdf?src-supplier=IHS, ComponentLink1URL=https://datasheet.octopart.com:443/CL05A106MP8NUB8-Samsung-Electro-Mechanics-datasheet-136460857.pdf?src-supplier=IHS, ComponentLink2Description=https://datasheet.octopart.com:443/CL05A106MP8NUB8-Samsung-Electro-Mechanics-datasheet-181551178.pdf?src-supplier=Newark, ComponentLink2URL=https://datasheet.octopart.com:443/CL05A106MP8NUB8-Samsung-Electro-Mechanics-datasheet-181551178.pdf?src-supplier=Newark, ComponentLink3Description=https://datasheet.octopart.com:443/CL05A106MP8NUB8-Samsung-Electro-Mechanics-datasheet-136031724.pdf?src-supplier=Newark, ComponentLink3URL=https://datasheet.octopart.com:443/CL05A106MP8NUB8-Samsung-Electro-Mechanics-datasheet-136031724.pdf?src-supplier=Newark, ComponentLink4Description=https://datasheet.octopart.com:443/CL05A106MP8NUB8-Samsung-Electro-Mechanics-datasheet-141346815.pdf?src-supplier=Samsung+SCT, ComponentLink4URL=https://datasheet.octopart.com:443/CL05A106MP8NUB8-Samsung-Electro-Mechanics-datasheet-141346815.pdf?src-supplier=Samsung+SCT, ComponentLink5Description=https://datasheet.octopart.com:443/CL05A106MP8NUB8-Samsung-Electro-Mechanics-datasheet-110326781.pdf?src-supplier=Future+Electronics, ComponentLink5URL=https://datasheet.octopart.com:443/CL05A106MP8NUB8-Samsung-Electro-Mechanics-datasheet-110326781.pdf?src-supplier=Future+Electronics, ComponentLink6Description=https://datasheet.octopart.com:443/CL05A106MP8NUB8-Samsung-Electro-Mechanics-datasheet-96443587.pdf?src-supplier=Future+Electronics, ComponentLink6URL=https://datasheet.octopart.com:443/CL05A106MP8NUB8-Samsung-Electro-Mechanics-datasheet-96443587.pdf?src-supplier=Future+Electronics, ComponentLink7Description=https://datasheet.octopart.com:443/CL05A106MP8NUB8-Samsung-Electro-Mechanics-datasheet-68297032.pdf?src-supplier=Future+Electronics, ComponentLink7URL=https://datasheet.octopart.com:443/CL05A106MP8NUB8-Samsung-Electro-Mechanics-datasheet-68297032.pdf?src-supplier=Future+Electronics, ComponentLink8Description=https://datasheet.octopart.com:443/CL05A106MP8NUB8-Samsung-Electro-Mechanics-datasheet-86032222.pdf?src-supplier=Future+Electronics, ComponentLink8URL=https://datasheet.octopart.com:443/CL05A106MP8NUB8-Samsung-Electro-Mechanics-datasheet-86032222.pdf?src-supplier=Future+Electronics, Country of Origin="Mainland China, Philippines, South Korea", Export Control Classification Number (ECCN) Code=EAR99, Harmonized Tariff Schedule (HTS) Code=8532.24.00.20, Height=800µm, Introduction Date=2014-02-27, Length=1mm, Lifecycle Status=Production, Manufacturer Part Number=CL05A106MP8NUB8, Material=Ceramic, Mounting Technology="Surface Mount", Number of Terminals=2, Pricing="1=0.35, 10=0.209, 50=0.153, 100=0.1358, 500=0.1069, 1000=0.09798, 2500=0.08857 (USD)", REACH SVHC=Yes, RoHS=Compliant, Schedule B="8532240020, 8532240020|8532240020, 8532240020|8532240020|8532240020, 8532240020|8532240020|8532240020|8532240020", Stock=1423154, Supplier=DigiKey, Thickness=889µm, Voltage Rating (DC)=10V, Width=500µm
D1: library part APHCM2012CGCK-F01, "LED GREEN CLEAR CHIP SMD / Green 570nm LED Indication - Discrete 2.1V 0805 (2012 Metric)", Case Code (Imperial)=0805, Case Code (Metric)=2012, Color=Green, Forward Current=30mA, Forward Voltage=2.1V, Lens Color=Clear, Manufacturer=Kingbright, Manufacturer Package Identifier="0805 (2012 metric)", Max Junction Temperature (Tj)=115°C, Max Operating Temperature=85°C, Min Operating Temperature=-40°C, Power Dissipation=75mW, Reverse Voltage=5V, Supplier Part Number=754-1094-1-ND, Test Current=20mA, Case/Package=0805, Category=LEDs, China RoHS=Compliant, ComponentLink1Description=https://datasheet.octopart.com:443/APHCM2012CGCK-F01-Kingbright-datasheet-151610464.pdf?src-supplier=IHS, ComponentLink1URL=https://datasheet.octopart.com:443/APHCM2012CGCK-F01-Kingbright-datasheet-151610464.pdf?src-supplier=IHS, ComponentLink2Description=https://datasheet.octopart.com:443/APHCM2012CGCK-F01-Kingbright-datasheet-158235.pdf?src-supplier=IHS, ComponentLink2URL=https://datasheet.octopart.com:443/APHCM2012CGCK-F01-Kingbright-datasheet-158235.pdf?src-supplier=IHS, ComponentLink3Description=https://datasheet.octopart.com:443/APHCM2012CGCK-F01-Kingbright-datasheet-12510959.pdf?src-supplier=Sager+Electronics, ComponentLink3URL=https://datasheet.octopart.com:443/APHCM2012CGCK-F01-Kingbright-datasheet-12510959.pdf?src-supplier=Sager+Electronics, ComponentLink4Description=https://datasheet.octopart.com:443/APHCM2012CGCK-F01-Kingbright-datasheet-150021452.pdf?src-supplier=Sager+Electronics, ComponentLink4URL=https://datasheet.octopart.com:443/APHCM2012CGCK-F01-Kingbright-datasheet-150021452.pdf?src-supplier=Sager+Electronics, ComponentLink5Description=https://datasheet.octopart.com:443/APHCM2012CGCK-F01-Kingbright-datasheet-9635685.pdf?src-supplier=RS+(Formerly+Allied+Electronics), ComponentLink5URL=https://datasheet.octopart.com:443/APHCM2012CGCK-F01-Kingbright-datasheet-9635685.pdf?src-supplier=RS+(Formerly+Allied+Electronics), Country of Origin="Mainland China", Dominant Wavelength=570nm, Harmonized Tariff Schedule (HTS) Code=8541.40.20.00, Height=400µm, Illumination Color=Green, Introduction Date=2005-03-30, Lead Free="Lead Free", Length=2mm, Lens Style="Clear, Flat", Lifecycle Status=Production, Luminous Intensity=40mcd, Manufacturer Part Number=APHCM2012CGCK-F01, Mounting Technology="Surface Mount", Number of Circuits=1, Number of LEDs=1, Number of Terminals=2, Packaging=Digi-Reel®, Peak Wavelength=574nm, Pins=2, Pricing="1=0.23, 10=0.155, 100=0.1081, 500=0.08668, 1000=0.07958 (USD)", REACH SVHC=Yes, RoHS=Compliant, Schedule B="8541402000, 8541402000|8541402000, 8541402000|8541402000|8541402000, 8541402000|8541402000|8541402000|8541402000", Shape=Rectangular, Stock=7334, Supplier=DigiKey, Terminal Pitch=2.1mm, Viewing Angle=110°, Wavelength=570nm, Width=1.25mm
D2: library part CMD17-21VRD/TR8, "CML CMD17-21VRD/TR8 LED SMT 0805 2.0V 6mcd 140deg Red 3K Part of the VCC Family of Products", Case Code (Imperial)=0805, Case Code (Metric)=2012, Color=Red, Forward Current=30mA, Forward Voltage=2.8V, Manufacturer=VCC, Max Operating Temperature=85°C, Min Operating Temperature=-40°C, Power Rating=100mW, Reverse Voltage=5V, Supplier Part Number=L62501DKR-ND, Test Current=20mA, Case/Package=0805, Category=LEDs, ComponentLink1Description=https://datasheet.octopart.com:443/CMD17-21VRD-TR8-Visual-Communications-datasheet-86420146.pdf?src-supplier=RS+(Formerly+Allied+Electronics), ComponentLink1URL=https://datasheet.octopart.com:443/CMD17-21VRD-TR8-Visual-Communications-datasheet-86420146.pdf?src-supplier=RS+(Formerly+Allied+Electronics), ComponentLink2Description=https://datasheet.octopart.com:443/CMD17-21VRD-TR8-Visual-Communications-datasheet-62311551.pdf?src-supplier=RS+(Formerly+Allied+Electronics), ComponentLink2URL=https://datasheet.octopart.com:443/CMD17-21VRD-TR8-Visual-Communications-datasheet-62311551.pdf?src-supplier=RS+(Formerly+Allied+Electronics), ComponentLink3Description=https://datasheet.octopart.com:443/CMD17-21VRD-TR8-VCC-datasheet-158457.pdf?src-supplier=IHS, ComponentLink3URL=https://datasheet.octopart.com:443/CMD17-21VRD-TR8-VCC-datasheet-158457.pdf?src-supplier=IHS, ComponentLink4Description=https://datasheet.octopart.com:443/CMD17-21VRD-TR8-Visual-Communications-datasheet-67475886.pdf?src-supplier=element14+APAC, ComponentLink4URL=https://datasheet.octopart.com:443/CMD17-21VRD-TR8-Visual-Communications-datasheet-67475886.pdf?src-supplier=element14+APAC, ComponentLink5Description=https://datasheet.octopart.com:443/CMD17-21VRD-TR8-Chicago-Miniature-Lighting-datasheet-22094594.pdf?src-supplier=Newark, ComponentLink5URL=https://datasheet.octopart.com:443/CMD17-21VRD-TR8-Chicago-Miniature-Lighting-datasheet-22094594.pdf?src-supplier=Newark, ComponentLink6Description=https://datasheet.octopart.com:443/CMD17-21VRD-TR8-Visual-Communications-datasheet-8816892.pdf?src-supplier=Newark, ComponentLink6URL=https://datasheet.octopart.com:443/CMD17-21VRD-TR8-Visual-Communications-datasheet-8816892.pdf?src-supplier=Newark, Country of Origin="Mainland China", Export Control Classification Number (ECCN) Code=EAR99, Harmonized Tariff Schedule (HTS) Code=8541.40.20.00, Height=1.1mm, Illumination Color=Red, Introduction Date=2002-01-15, Lead Free="Lead Free", Length=2mm, Lens Color=Red, Lens Style="Colored, Diffused, Rectangular, Tinted", Lifecycle Status=Production, Luminous Intensity=3mcd, Manufacturer Part Number=CMD17-21VRD/TR8, Mounting Technology="Surface Mount", Number of Circuits=1, Number of LEDs=1, Number of Terminals=2, Packaging="Tape and Reel", Peak Wavelength=640nm, Pins=2, Pricing="1=0.74, 10=0.511, 100=0.3715, 500=0.30926, 1000=0.28883, 2000=0.27148 (USD)", REACH SVHC=Yes, Reverse Voltage (DC)=5V, RoHS=Compliant, Schedule B="8541402000, 8541402000|8541402000|8541402000|8541402000|8541402000", Shape=Rectangular, Stock=24290, Supplier=DigiKey, Terminal Pitch=1.6mm, Viewing Angle=140°, Wavelength=640nm, Width=1.25mm
ESP UART: "USB Connector, 16 Contact(s), Female, Right Angle, Surface Mount Terminal, Locking, Receptacle", Contact Resistance=50mΩ, Current Rating=1.25A, Dielectric Material=Polyamide, Insulation Color=Black, Insulation Resistance=100MΩ, Manufacturer=Molex, Max Operating Temperature=85°C, Min Operating Temperature=-40°C, Supplier Part Number=900-2171790001CT-ND, Voltage Rating=30V, Category="USB Connectors", China RoHS=Compliant, ComponentLink1Description=https://datasheet.octopart.com:443/217179-0001-Molex-datasheet-158871109.pdf?src-supplier=ODG+(Origin+Data+Global), ComponentLink1URL=https://datasheet.octopart.com:443/217179-0001-Molex-datasheet-158871109.pdf?src-supplier=ODG+(Origin+Data+Global), ComponentLink2Description=https://sigma.octopart.com:443/158871110/technical_drawing/Molex-217179-0001.pdf?src-supplier=Upverter, ComponentLink2URL=https://sigma.octopart.com:443/158871110/technical_drawing/Molex-217179-0001.pdf?src-supplier=Upverter, ComponentLink3Description=https://datasheet.octopart.com:443/217179-0001-Molex-datasheet-164573281.pdf?src-supplier=RS+(Formerly+Allied+Electronics), ComponentLink3URL=https://datasheet.octopart.com:443/217179-0001-Molex-datasheet-164573281.pdf?src-supplier=RS+(Formerly+Allied+Electronics), ComponentLink4Description=http://sigma.octopart.com:80/reach_statement/Molex-company-74.pdf?src-supplier=Compliance+Statements, ComponentLink4URL=http://sigma.octopart.com:80/reach_statement/Molex-company-74.pdf?src-supplier=Compliance+Statements, ComponentLink5Description=http://sigma.octopart.com:80/rohs_statement/Molex-company-73.pdf?src-supplier=Compliance+Statements, ComponentLink5URL=http://sigma.octopart.com:80/rohs_statement/Molex-company-73.pdf?src-supplier=Compliance+Statements, ComponentLink6Description=http://sigma.octopart.com:80/conflict_mineral_statement/Molex-company-72.pdf?src-supplier=Compliance+Statements, ComponentLink6URL=http://sigma.octopart.com:80/conflict_mineral_statement/Molex-company-72.pdf?src-supplier=Compliance+Statements, Contact Material="Gold, Nickel", Country of Origin="Mainland China", Export Control Classification Number (ECCN) Code=EAR99, Gender=Female, Harmonized Tariff Schedule (HTS) Code=8536.69.40.30, Height=3.36mm, Introduction Date=2021-08-30, Lifecycle Status=Production, Manufacturer Part Number=217179-0001, Number of Contacts=16, Number of Ports=1, Number of Positions=16, Number of Rows=1, Orientation="Right Angle", Pricing="1=0.83, 10=0.704, 25=0.6596, 50=0.628, 100=0.598, 250=0.56052, 500=0.53374 (USD)", REACH SVHC=Yes, RoHS=Compliant, Shell Finish=Nickel, Shell Material="Stainless Steel", Stock=65324, Supplier=DigiKey, Terminal Pitch=500µm, USB Standard="USB 2.0"
J1 J2: "Conn Unshrouded Header HDR 24 POS 2.54mm Solder ST Thru-Hole KK® Bag", Color=Black, Contact Resistance=20mΩ, Current Rating=4A, Insulation Resistance=50GΩ, Manufacturer=Molex, Manufacturer Lifecycle Status=ACTIVE, Max Operating Temperature=75°C, Min Operating Temperature=-40°C, Ratings=CSA, Supplier Part Number=900-0022284245-ND, Category="Headers and Wire Housings", China RoHS=Compliant, ComponentLink1Description=https://datasheet.octopart.com:443/22-28-4245-Molex-datasheet-166051265.pdf?src-supplier=IHS, ComponentLink1URL=https://datasheet.octopart.com:443/22-28-4245-Molex-datasheet-166051265.pdf?src-supplier=IHS, ComponentLink2Description=https://datasheet.octopart.com:443/022284245-Molex-datasheet-8337137.pdf?src-supplier=Arrow+Electronics, ComponentLink2URL=https://datasheet.octopart.com:443/022284245-Molex-datasheet-8337137.pdf?src-supplier=Arrow+Electronics, ComponentLink3Description=https://datasheet.octopart.com:443/22-28-4245-Molex-datasheet-16300812.pdf?src-supplier=Molex, ComponentLink3URL=https://datasheet.octopart.com:443/22-28-4245-Molex-datasheet-16300812.pdf?src-supplier=Molex, ComponentLink4Description=https://sigma.octopart.com:443/16300370/technical_drawing/Molex-22-28-4245.pdf?src-supplier=Molex, ComponentLink4URL=https://sigma.octopart.com:443/16300370/technical_drawing/Molex-22-28-4245.pdf?src-supplier=Molex, ComponentLink5Description=https://datasheet.octopart.com:443/22-28-4245-Molex-datasheet-4210.pdf?src-supplier=DigiKey, ComponentLink5URL=https://datasheet.octopart.com:443/22-28-4245-Molex-datasheet-4210.pdf?src-supplier=DigiKey, ComponentLink6Description=http://sigma.octopart.com:80/16300813/rohs_statement/Molex-22-28-4245.pdf?src-supplier=Compliance+Statements, ComponentLink6URL=http://sigma.octopart.com:80/16300813/rohs_statement/Molex-22-28-4245.pdf?src-supplier=Compliance+Statements, ComponentLink7Description=http://sigma.octopart.com:80/reach_statement/Molex-company-74.pdf?src-supplier=Compliance+Statements, ComponentLink7URL=http://sigma.octopart.com:80/reach_statement/Molex-company-74.pdf?src-supplier=Compliance+Statements, ComponentLink8Description=http://sigma.octopart.com:80/rohs_statement/Molex-company-73.pdf?src-supplier=Compliance+Statements, ComponentLink8URL=http://sigma.octopart.com:80/rohs_statement/Molex-company-73.pdf?src-supplier=Compliance+Statements, ComponentLink9Description=http://sigma.octopart.com:80/conflict_mineral_statement/Molex-company-72.pdf?src-supplier=Compliance+Statements, ComponentLink9URL=http://sigma.octopart.com:80/conflict_mineral_statement/Molex-company-72.pdf?src-supplier=Compliance+Statements, Contact Material=Brass, Contact Plating=Gold, Country of Origin=US, Export Control Classification Number (ECCN) Code=EAR99, Gender=Male, Harmonized Tariff Schedule (HTS) Code=8536.69.40.40, Housing Color=Black, Introduction Date=1994-12-01, Lead Free="Lead Free", Lifecycle Status=Production, Manufacturer Part Number=22-28-4245, Mounting Technology="Through Hole", Number of Circuits=24, Number of Contacts=24, Number of Positions=24, Number of Rows=1, Orientation=Vertical, Packaging=Bulk, Pins=24, Pitch=2.54mm, Plating=Tin, Plating Thickness=381nm, Pricing="1=3.81, 10=3.237, 100=2.7512, 500=2.45582, 1000=2.33866 (USD)", REACH SVHC=Yes, RoHS=Compliant, Schedule B="8536694040, 8536694040|8536694040|8536694040|8536694040|8536694040", Stock=579, Supplier=DigiKey, Terminal Pitch=2.54mm, Termination=Solder